# Altium PCB PCB1.PcbDoc
Units mm, origin at the board's own origin, x right, y up, seen from the top; angles counter-clockwise.
Board outline 70 x 52 mm, 2 copper layers (Top Layer, Bottom Layer), stack 1.581 mm thick; 33 components, 46 nets, 205 pads, 143 vias.
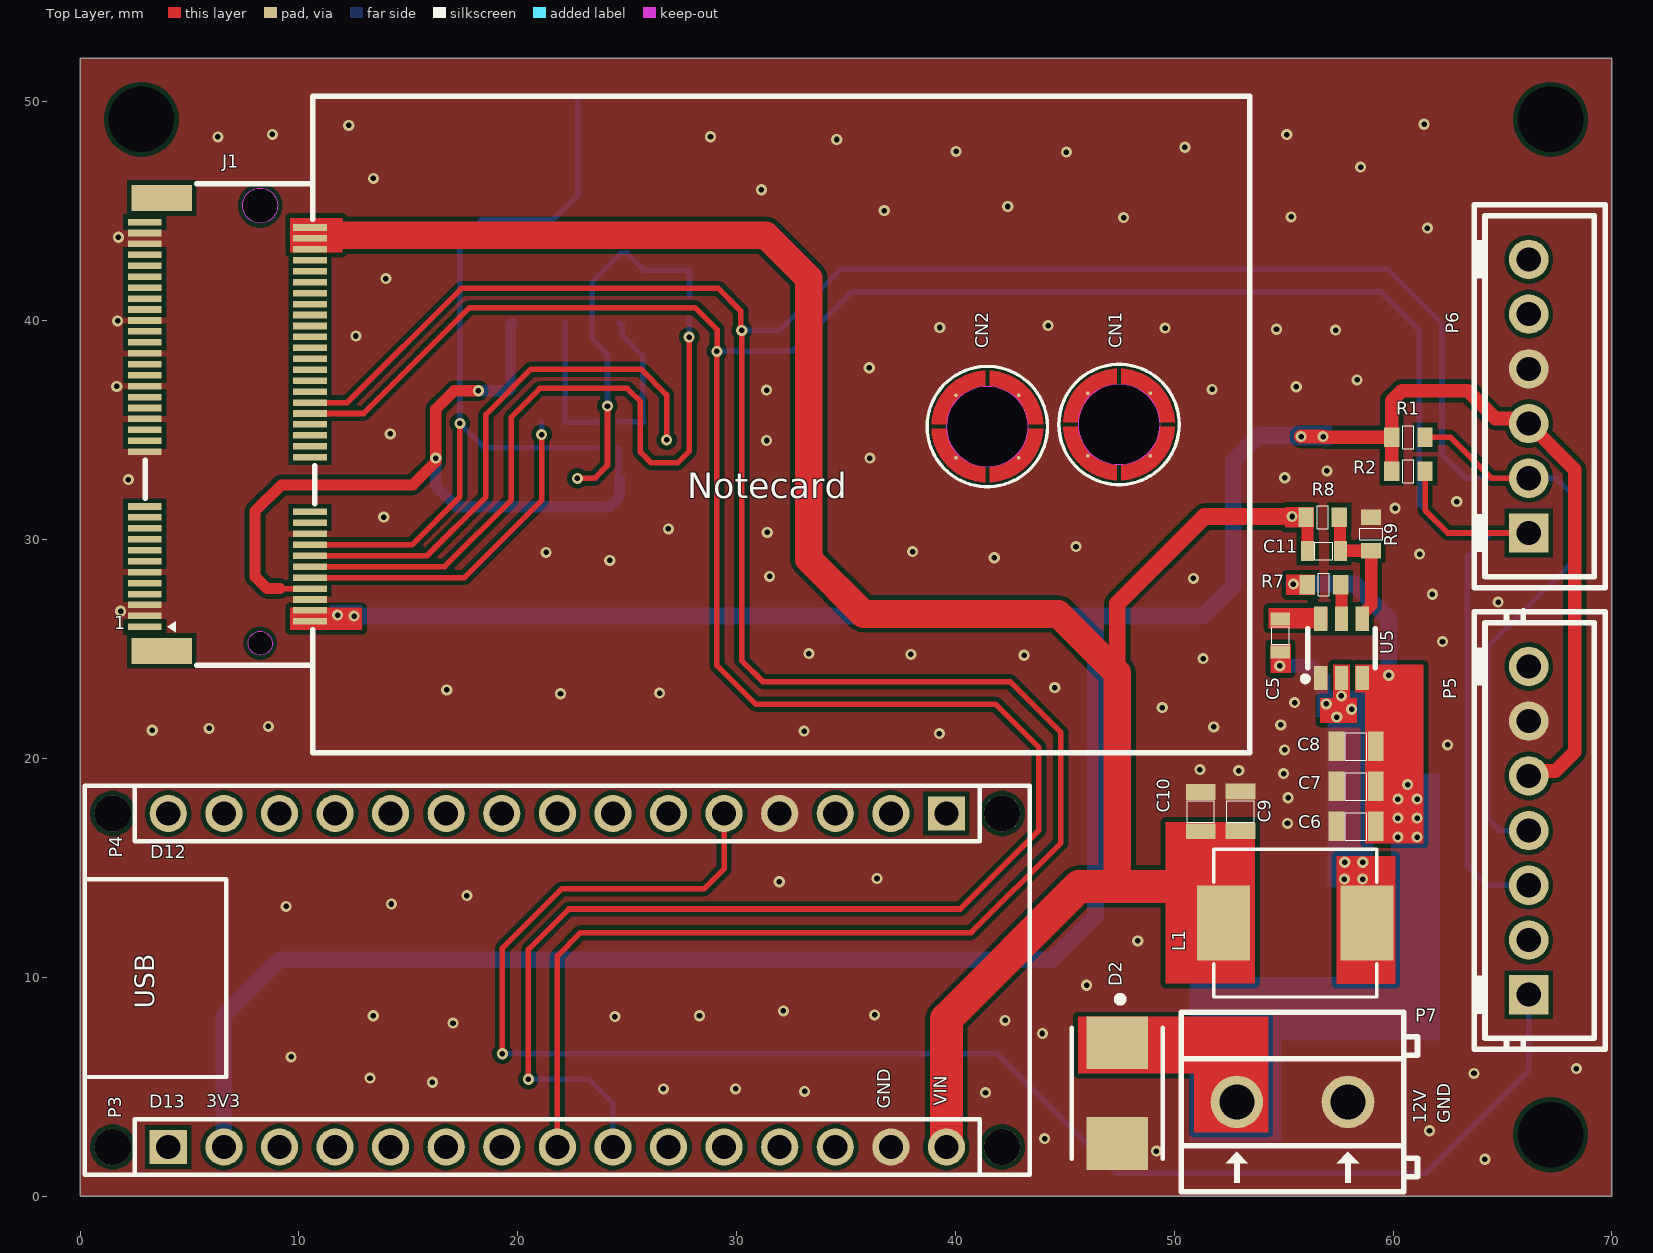
[diagram p0: Top Layer view]
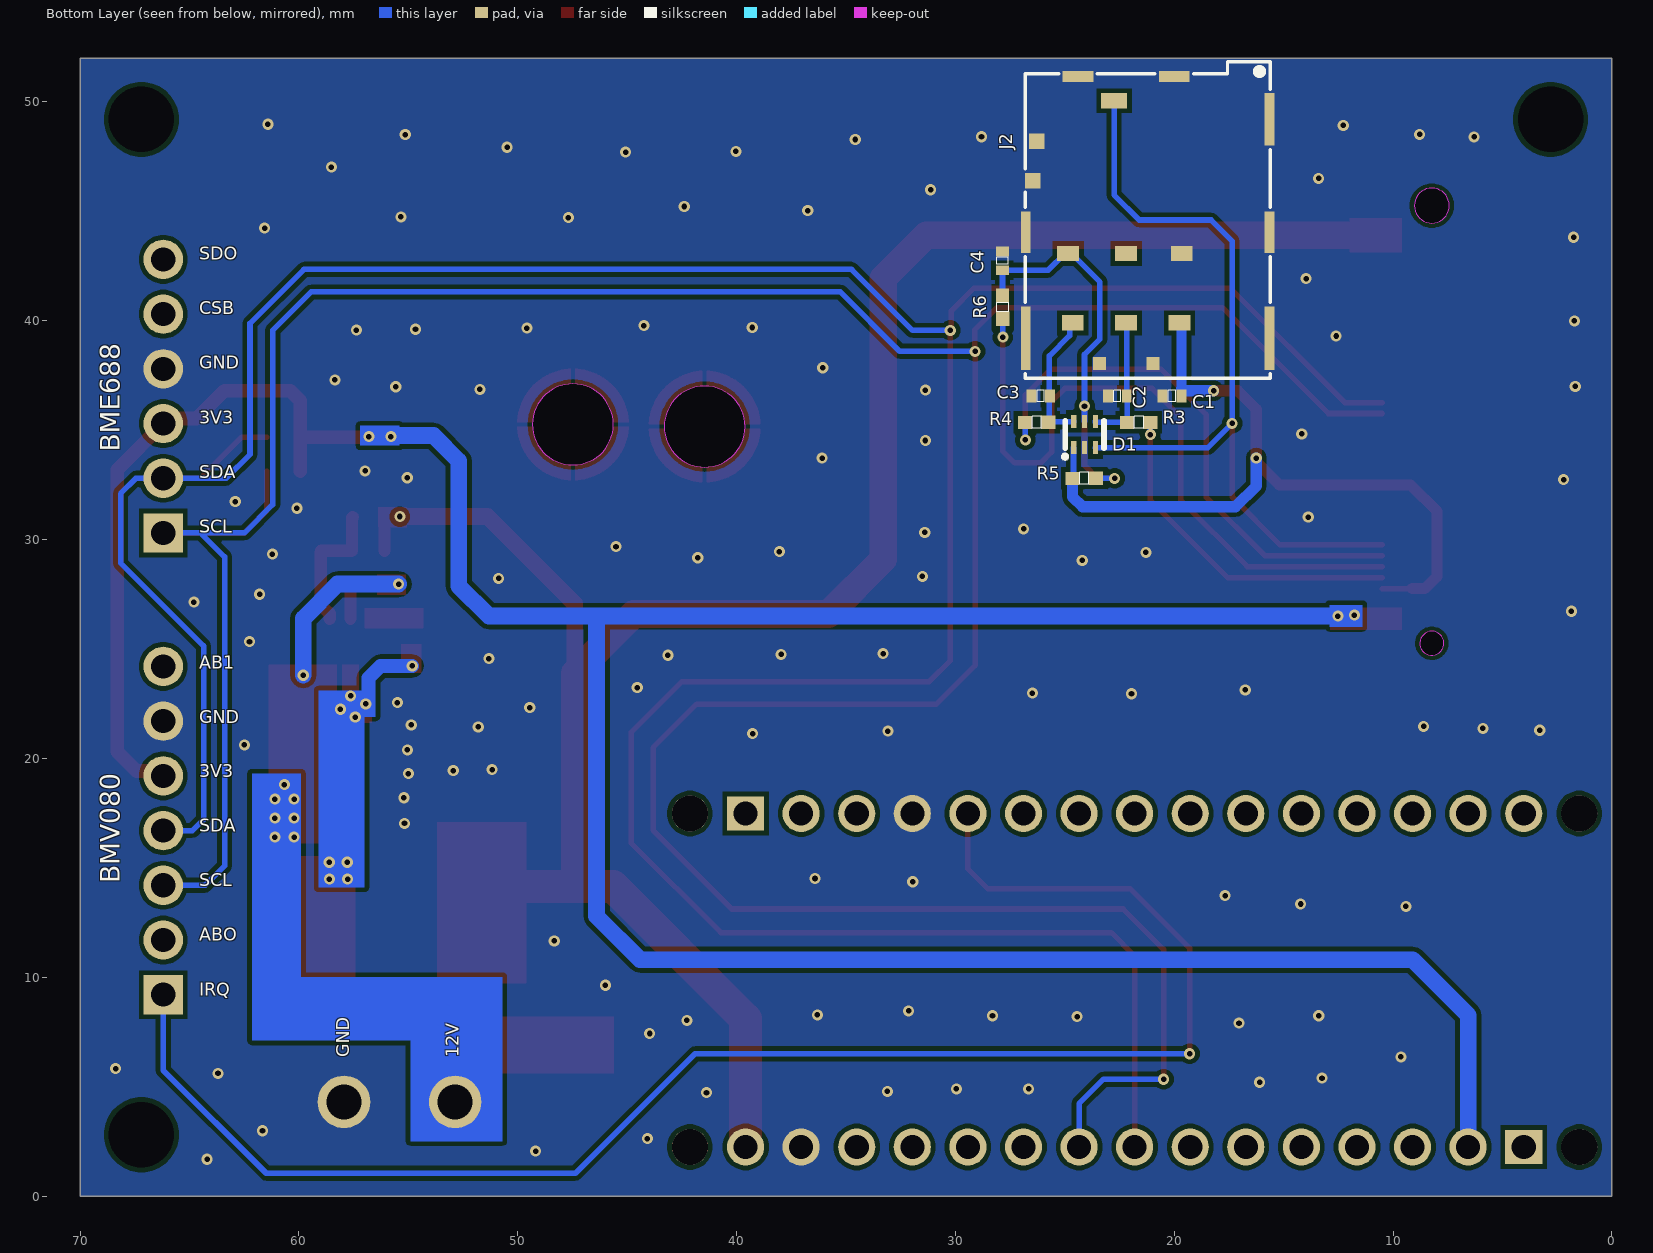
[diagram p1: Bottom Layer view, seen from below]

## Layer stack, top to bottom
Top Solder: solder mask 0.0102, Solder Resist, Dk 3.5
Top Layer: signal copper 0.0356
Dielectric 1: dielectric 1.51, FR-4, Dk 4.8
Bottom Layer: signal copper 0.0356
Bottom Solder: solder mask 0.0102, Solder Resist, Dk 3.5

## Board outline
0,0 0,52 70,52 70,0

## Design rules (kind name [scope] priority, off if disabled: settings)
Clearance [All] p1: gap=0.203 ignorepadtopadclearanceinfootprint=TRUE except(0: Arc-Hole Track-Hole SMDPad-Hole THPad-Hole Via-Hole Fill-Hole Poly-Hole Region-Hole Text-Hole)
HoleSize [All] p1: absolutevalues=TRUE maxlimit=12.7 minlimit=0.025 maxpercent=80.000 minpercent=20.000
MinimumSolderMaskSliver [All] p1: minsoldermaskwidth=0.102
PolygonConnect [All] p1: connectstyle=Direct reliefconductorwidth=0.254 reliefentries=4 polygonreliefangle="90 Angle" airgapwidth=0.254
RoutingVias [All] p1: holewidth=0.254 width=0.508 viastyle="Through Hole" minholewidth=0.254 minwidth=0.508 maxholewidth=0.711 maxwidth=1.27
SilkToSilkClearance [All] p1: silktosilkclearance=0.203
SilkToSolderMaskClearance [IsPad] p1: minsilkscreentomaskgap=0.102 clearancetoexposedcopper=TRUE
SolderMaskExpansion [All] p1: expansion=0.102 istentingtop=FALSE
UnRoutedNet [All] p1: checkbadconnections=TRUE
Width [All] p1: maxlimit=2.54 minlimit=0.203 preferedwidth=0.254
25 further rules are at their usual default settings.

## Components (designator, comment, footprint, x,y, rotation, side; value= is the part's Value field where it differs from the comment)
C1 "100nF" "Ceramic capacitor (0402)" 20.1,36.557 r0 bottom
C2 "33pF" "Ceramic capacitor (0402)" 22.6,36.557 r0 bottom
C3 "33pF" "Ceramic capacitor (0402)" 26.1,36.557 r0 bottom
C4 "33pF" "Ceramic capacitor (0402)" 27.851,42.734 r90 bottom
C5 "0.1uF" "Ceramic capacitor (0603)" 54.85,25.61 r90 top value=100nF
C6 "10uF" "Ceramic capacitor (0805)" 58.31,16.89 r180 top
C7 "10uF" "Ceramic capacitor (0805)" 58.31,18.72 r180 top
C8 "0.1uF" "Ceramic capacitor (0805)" 58.31,20.55 r180 top value=100nF
C9 "22uF" "Ceramic capacitor (0805)" 53.027,17.58 r90 top
C10 "22uF" "Ceramic capacitor (0805)" 51.22,17.57 r90 top
C11 "DNP" "Ceramic capacitor (0603)" 56.84,29.476 r180 top
CN1 "9774025151R" SMD-1_BD5.1-D3.5 47.479,35.258 r0 top
CN2 "9774025151R" SMD-1_BD5.1-D3.5 41.459,35.163 r0 top
D1 "PESD5V0L5UV,115" SOT-666-6_L1.6-W1.2-P0.50-LS1.6-TL 24.1,34.8 r90 bottom
D2 "SS54(SMB)" FP_SS54(SMB) 47.4,4.7 r270 top
J1 "MDT420E01001" CONN-SMD_67P-P0.50_TE_2199119-6 6.73,35.26 r90 top
J2 "SF72S006VBDR2500" NANO-SIM-SMD_SMN-315-ARP7 21.215,44.599 r180 bottom locked
L1 "3.3uF" IND-SMD_L7.3-W6.6 55.53,12.47 r0 top
P3 "KH-2.54FH-1X15P-H8.5" HDR-TH_15P-P2.54-V-F 21.81,2.24 r0 top locked
P4 "KH-2.54FH-1X15P-H8.5" HDR-TH_15P-P2.54-V-F 21.81,17.48 r180 top locked
P5 "B7B-XH-A(LF)(SN)" CONN-TH_7P-P2.50_B7B-XH-A-LF-SN 66.2,16.699 r90 top
P6 "B6B-XH-A(LF)(SN)" CONN-TH_6P-P2.50_B6B-XH-A-LF-SN 66.2,36.55 r90 top
P7 "KF127-5.08-2P" CONN-TH_P5.08_KF127-5.08-2P 55.4,4.3 r0 top
R1 "10K" "Resistor  (0603)" 60.7,34.7 r180 top
R2 "10K" "Resistor  (0603)" 60.7,33.151 r180 top
R3 "22R" "Resistor  (0402)" 21.6,35.355 r0 bottom
R4 "22R" "Resistor  (0402)" 26.3,35.355 r180 bottom
R5 "10K" "Resistor  (0402)" 24.1,32.8 r0 bottom
R6 "22R" "Resistor  (0402)" 27.839,40.6 r90 bottom
R7 "10K" "Resistor  (0603)" 56.84,27.912 r0 top
R8 "54.9K" "Resistor  (0603)" 56.78,31.05 r180 top
R9 "10K" "Resistor  (0603)" 58.97,30.25 r270 top
U5 "TPS563201DDCR" SOT-23-6_L2.9-W1.6-P0.95-LS2.8-BR 57.644,25.03 r270 top

## Footprints (in the part's own frame and the unit in brackets; to place one, negate y for a bottom-side part, rotate by r counter-clockwise, add the part's x,y. Pads: shape width x height; smd on the part's side, far side on the other; paste and mask are expansions set on the pad)
"Ceramic capacitor (0402)" [mm]
  rect 0.45x0.6 smd: 1(-0.43,0) 2(0.43,0)
  silkscreen extent -0.16,-0.26 0.17,0.26, body extent -0.5,-0.25 0.5,0.25, height 0.56
"Ceramic capacitor (0603)" [mm]
  rect 0.6x0.9 smd: 1(-0.75,0) 2(0.75,0)
  silkscreen extent -0.4,-0.4 0.41,0.4, body extent -0.8,-0.4 0.8,0.4, height 0.8
"Ceramic capacitor (0805)" [mm]
  rect 0.725x1.35 smd: 1(-0.9,0) 2(0.9,0)
  silkscreen extent -0.49,-0.62 0.49,0.63, body extent -1,-0.62 1,0.63, height 0.85
CONN-SMD_67P-P0.50_TE_2199119-6 [mil]
  rect 11.8x61 smd paste+0 mask+2: 1(-364.2,148.7) 2(-354.4,-148.6) 3(-344.5,148.7) 4(-334.7,-148.6) 5(-324.8,148.7) 6(-315,-148.6) 7(-305.2,148.7) 8(-295.3,-148.6) 9(-285.5,148.7) 10(-275.6,-148.6) 11(-265.8,148.7) 12(-255.9,-148.6) 13(-246.1,148.7) 14(-236.3,-148.6) 15(-226.4,148.7) 16(-216.6,-148.6) 17(-206.7,148.7) 18(-196.9,-148.6) 19(-187,148.7) 20(-177.2,-148.6) 21(-167.4,148.7) 22(-157.5,-148.6) 23(-147.7,148.7) 32(-59.1,-148.6) 33(-49.3,148.7) 34(-39.4,-148.6) 35(-29.6,148.7) 36(-19.7,-148.6) 37(-9.9,148.7) 38(0,-148.6) 39(9.8,148.7) 40(19.6,-148.6) 41(29.5,148.7) 42(39.3,-148.6) 43(49.2,148.7) 44(59,-148.6) 45(68.9,148.7) 46(78.7,-148.6) 47(88.5,148.7) 48(98.4,-148.6) 49(108.2,148.7) 50(118.1,-148.6) 51(127.9,148.7) 52(137.8,-148.6) 53(147.6,148.7) 54(157.4,-148.6) 55(167.3,148.7) 56(177.1,-148.6) 57(187,148.7) 58(196.8,-148.6) 59(206.7,148.7) 60(216.5,-148.6) 61(226.3,148.7) 62(236.2,-148.6) 63(246,148.7) 64(255.9,-148.6) 65(265.7,148.7) 66(275.6,-148.6) 67(285.4,148.7) 68(295.2,-148.6) 69(305.1,148.7) 70(314.9,-148.6) 71(324.8,148.7) 72(334.6,-148.6) 73(344.4,148.7) 74(354.3,-148.6) 75(364.1,148.7)
  rect 47.2x108.3 smd paste+0 mask+2: 76(-407.5,118.1) 77(407.4,118.1)
  round 19.68 hole 43.31: ""(-393.7,-59.06)
  round 39.37 hole 62.99: ""(393.7,-59.06)
  Keep-Out Layer board cut-out: 425.2,-59 424.8,-64 423.6,-68.8 421.7,-73.3 419.1,-77.5 415.9,-81.3 412.2,-84.5 408,-87.1 403.4,-89 398.6,-90.1 393.7,-90.5 388.7,-90.1 383.9,-89 379.4,-87.1 375.1,-84.5 371.4,-81.3 368.2,-77.5 365.6,-73.3 363.7,-68.8 362.6,-64 362.2,-59 362.6,-54.1 363.7,-49.3 365.6,-44.7 368.2,-40.5 371.4,-36.8 375.1,-33.5 379.4,-31 383.9,-29.1 388.7,-27.9 393.7,-27.5 398.6,-27.9 403.4,-29.1 408,-31 412.2,-33.5 415.9,-36.8 419.1,-40.5 421.7,-44.7 423.6,-49.3 424.8,-54.1 425.2,-59
  Keep-Out Layer board cut-out: -372.1,-59 -372.5,-63.1 -373.6,-67.1 -375.5,-70.7 -378.1,-74 -381.2,-76.7 -384.7,-78.7 -388.6,-80.1 -392.7,-80.7 -396.8,-80.5 -400.8,-79.5 -404.6,-77.8 -407.9,-75.4 -410.8,-72.4 -413,-69 -414.5,-65.1 -415.3,-61.1 -415.3,-57 -414.5,-52.9 -413,-49.1 -410.8,-45.6 -407.9,-42.7 -404.6,-40.3 -400.8,-38.6 -396.8,-37.6 -392.7,-37.4 -388.6,-38 -384.7,-39.3 -381.2,-41.4 -378.1,-44.1 -375.5,-47.3 -373.6,-51 -372.5,-54.9 -372.1,-59
  silkscreen extent -433,-157 433,148, body extent -431,-171 431,172, height 121
CONN-TH_6P-P2.50_B6B-XH-A-LF-SN [mm]
  rect 1.801x1.801 hole 1.1: 1(-6.251,0)
  round 1.801 hole 1.1: 2(-3.749,0) 3(-1.25,0) 4(1.252,0) 5(3.752,0) 6(6.251,0)
  silkscreen extent -8.75,-3.5 8.75,2.5, body extent -8.75,-3.35 8.75,2.35, height 7.02
CONN-TH_7P-P2.50_B7B-XH-A-LF-SN [mm]
  rect 1.801x1.801 hole 1.1: 1(-7.501,0)
  round 1.801 hole 1.1: 2(-5.001,0) 3(-2.499,0) 4(0,0) 5(2.499,0) 6(4.999,0) 7(7.501,0)
  silkscreen extent -10,-3.5 10.03,2.5, body extent -9.98,-3.33 10.02,2.37, height 7.02
CONN-TH_P5.08_KF127-5.08-2P [mil]
  round 94.5 hole 63: 1(-100,0) 2(100,0)
  silkscreen extent -200,-161 225,161, body extent -200,-161 222,161, height 398
FP_SS54(SMB) [mm]
  rect 2.4x2.8 smd: 1(-2.3,0) 2(2.3,0)
  silkscreen extent -4.43,-2.08 2.99,2.08
HDR-TH_15P-P2.54-V-F [mil]
  rect 66.9x62 hole 43.3: 1(-700,0)
  round 66.9 hole 43.3: 2(-600,0) 3(-500,0) 4(-400,0) 5(-300,0) 6(-200,0) 7(-100,0) 8(0,0) 9(100,0) 10(200,0) 11(300,0) 12(400,0) 13(500,0) 14(600,0) 15(700,0)
  silkscreen extent -760,-50 760,50, body extent -758,-49 757,50, height 335
IND-SMD_L7.3-W6.6 [mil]
  rect 95.4x134.6 smd: 1(129,0) 2(-129.1,0)
  silkscreen extent -147,-133 147,133, body extent -140,-130 140,130, height 114
NANO-SIM-SMD_SMN-315-ARP7 [mil]
  rect 39.4x27.6 smd: 1(57.3,-185) 2(-38.7,-185) 3(-134.8,-185) 5(61.3,-60.2) 6(-38.7,-60.2) 7(-143.1,-60.2)
  rect 23.6x23.6 smd: 4(9.3,-257.9) 8(-86.8,-257.9)
  rect 27.6x27.6 smd: 9(-206.8,70.9) 13(-199.8,141.7)
  rect 47.2x27.6 smd: 10(-60.4,214.6)
  rect 17.7x114.2 smd: 11(-219.4,-212.6) 18(219.5,-212.6)
  rect 17.7x74.8 smd: 12(-219.4,-21.6) 17(219.5,-21.6)
  rect 55.1x19.7 smd: 14(-125.4,257.9) 15(47.9,257.9)
  rect 17.7x94.5 smd: 16(219.5,181.1)
  silkscreen extent -220,-285 221,285, body extent -220,-285 221,285, height 51
"Resistor  (0402)" [mm]
  rect 0.65x0.6 smd: 1(-0.508,0) 2(0.544,0.006)
  silkscreen extent -0.2,-0.28 0.23,0.28, body extent -0.73,-0.25 0.76,0.25, height 0.36
"Resistor  (0603)" [mm]
  rect 0.7x0.9 smd: 1(-0.762,0.025) 2(0.762,0.025)
  silkscreen extent -0.25,-0.49 0.25,0.55, body extent -1.05,-0.38 1.05,0.42, height 0.5
SMD-1_BD5.1-D3.5 [mm]
  round 0.17 smd: 1(-1.433,-1.433) 1(-1.433,1.43) 1(1.43,-1.433) 1(1.43,1.43)
  Top Layer region: 2.55,0.099 1.849,0.099 1.844,0.16 1.839,0.221 1.831,0.282 1.819,0.343 1.808,0.404 1.793,0.465 1.775,0.523 1.758,0.582 1.737,0.64 1.717,0.699 1.692,0.754 1.666,0.81 1.638,0.866 1.608,0.919 1.577,0.973 1.544,1.024 1.509,1.074 1.473,1.125 1.435,1.173 1.394,1.219 1.354,1.265 1.311,1.311 1.265,1.354 1.219,1.394 1.173,1.435 1.125,1.473 1.074,1.509 1.024,1.544 0.973,1.577 0.919,1.608 0.866,1.638 0.81,1.666 0.754,1.692 0.699,1.717 0.64,1.737 0.582,1.758 0.523,1.775 0.465,1.793 0.404,1.808 0.343,1.819 0.282,1.831 0.221,1.839 0.16,1.844 0.099,1.849 0.099,2.55 0.173,2.545 0.246,2.54 0.318,2.532 0.391,2.522 0.462,2.51 0.536,2.494 0.607,2.479 0.678,2.459 0.747,2.438 0.818,2.418 0.886,2.393 0.955,2.367 1.021,2.337 1.09,2.306 1.156,2.276 1.219,2.24 1.283,2.205 1.346,2.167 1.407,2.129 1.468,2.088 1.527,2.045 1.585,1.999 1.643,1.953 1.697,1.905 1.753,1.854 1.803,1.803 1.854,1.753 1.905,1.697 1.953,1.643 1.999,1.585 2.045,1.527 2.088,1.468 2.129,1.407 2.167,1.346 2.205,1.283 2.24,1.219 2.276,1.156 2.306,1.09 2.337,1.021 2.367,0.955 2.393,0.886 2.418,0.818 2.438,0.747 2.459,0.678 2.479,0.607 2.494,0.536 2.51,0.462 2.522,0.391 2.532,0.318 2.54,0.246 2.545,0.173 2.55,0.099
  Top Layer region: -0.102,2.55 -0.102,1.849 -0.163,1.844 -0.224,1.839 -0.284,1.831 -0.345,1.821 -0.406,1.808 -0.465,1.793 -0.526,1.778 -0.584,1.758 -0.643,1.737 -0.699,1.717 -0.757,1.692 -0.813,1.666 -0.866,1.638 -0.922,1.608 -0.973,1.577 -1.026,1.544 -1.077,1.509 -1.125,1.473 -1.173,1.435 -1.222,1.394 -1.267,1.354 -1.311,1.311 -1.354,1.265 -1.394,1.219 -1.435,1.173 -1.473,1.125 -1.511,1.074 -1.544,1.024 -1.577,0.973 -1.61,0.919 -1.638,0.866 -1.666,0.81 -1.694,0.754 -1.717,0.699 -1.74,0.64 -1.76,0.582 -1.778,0.523 -1.796,0.465 -1.808,0.404 -1.821,0.343 -1.831,0.282 -1.839,0.221 -1.847,0.16 -1.852,0.099 -2.55,0.099 -2.548,0.173 -2.54,0.246 -2.532,0.318 -2.522,0.391 -2.51,0.462 -2.497,0.536 -2.479,0.607 -2.461,0.678 -2.441,0.747 -2.418,0.818 -2.395,0.886 -2.367,0.955 -2.339,1.021 -2.309,1.09 -2.276,1.156 -2.243,1.219 -2.207,1.283 -2.169,1.346 -2.129,1.407 -2.088,1.468 -2.045,1.527 -2.002,1.585 -1.953,1.643 -1.908,1.697 -1.857,1.753 -1.806,1.803 -1.753,1.854 -1.699,1.905 -1.643,1.953 -1.587,1.999 -1.529,2.045 -1.471,2.088 -1.41,2.129 -1.349,2.167 -1.285,2.205 -1.222,2.24 -1.156,2.276 -1.09,2.306 -1.024,2.337 -0.955,2.367 -0.889,2.393 -0.818,2.418 -0.749,2.438 -0.678,2.459 -0.607,2.479 -0.536,2.494 -0.465,2.51 -0.391,2.522 -0.32,2.532 -0.246,2.54 -0.173,2.545 -0.102,2.55
  Top Layer region: -2.55,-0.102 -1.852,-0.102 -1.847,-0.163 -1.841,-0.224 -1.831,-0.284 -1.821,-0.345 -1.808,-0.406 -1.796,-0.465 -1.778,-0.526 -1.76,-0.584 -1.74,-0.643 -1.717,-0.699 -1.694,-0.757 -1.666,-0.813 -1.638,-0.866 -1.61,-0.922 -1.577,-0.973 -1.544,-1.026 -1.511,-1.077 -1.473,-1.125 -1.435,-1.173 -1.397,-1.222 -1.354,-1.267 -1.311,-1.311 -1.267,-1.354 -1.222,-1.394 -1.173,-1.435 -1.125,-1.473 -1.077,-1.511 -1.026,-1.544 -0.973,-1.577 -0.922,-1.61 -0.866,-1.638 -0.813,-1.666 -0.757,-1.694 -0.699,-1.717 -0.643,-1.74 -0.584,-1.76 -0.526,-1.778 -0.465,-1.796 -0.406,-1.808 -0.345,-1.821 -0.284,-1.831 -0.224,-1.839 -0.163,-1.847 -0.102,-1.852 -0.102,-2.55 -0.175,-2.548 -0.246,-2.54 -0.32,-2.532 -0.391,-2.522 -0.465,-2.51 -0.536,-2.497 -0.607,-2.479 -0.678,-2.461 -0.749,-2.441 -0.818,-2.418 -0.889,-2.395 -0.955,-2.367 -1.024,-2.339 -1.09,-2.309 -1.156,-2.276 -1.222,-2.243 -1.285,-2.207 -1.349,-2.169 -1.41,-2.129 -1.471,-2.088 -1.529,-2.045 -1.587,-2.002 -1.643,-1.953 -1.699,-1.908 -1.753,-1.857 -1.806,-1.806 -1.857,-1.753 -1.908,-1.699 -1.953,-1.643 -2.002,-1.587 -2.045,-1.529 -2.088,-1.471 -2.129,-1.41 -2.169,-1.349 -2.207,-1.285 -2.243,-1.222 -2.276,-1.156 -2.309,-1.09 -2.339,-1.024 -2.367,-0.955 -2.395,-0.889 -2.418,-0.818 -2.441,-0.749 -2.461,-0.678 -2.479,-0.607 -2.497,-0.536 -2.51,-0.465 -2.522,-0.391 -2.532,-0.32 -2.54,-0.246 -2.548,-0.173 -2.55,-0.102
  Top Layer region: 0.099,-2.55 0.099,-1.852 0.16,-1.847 0.221,-1.841 0.282,-1.831 0.343,-1.821 0.404,-1.808 0.465,-1.796 0.523,-1.778 0.582,-1.76 0.64,-1.74 0.699,-1.717 0.754,-1.694 0.81,-1.666 0.866,-1.638 0.919,-1.61 0.973,-1.577 1.024,-1.544 1.074,-1.511 1.125,-1.473 1.173,-1.435 1.219,-1.397 1.265,-1.354 1.311,-1.311 1.354,-1.267 1.394,-1.222 1.433,-1.173 1.473,-1.125 1.509,-1.077 1.544,-1.026 1.577,-0.973 1.608,-0.922 1.638,-0.866 1.666,-0.813 1.692,-0.757 1.714,-0.699 1.737,-0.643 1.758,-0.584 1.775,-0.526 1.793,-0.465 1.808,-0.406 1.819,-0.345 1.831,-0.284 1.839,-0.224 1.844,-0.163 1.849,-0.102 2.55,-0.102 2.545,-0.175 2.54,-0.246 2.532,-0.32 2.522,-0.391 2.51,-0.465 2.494,-0.536 2.479,-0.607 2.459,-0.678 2.438,-0.749 2.418,-0.818 2.393,-0.889 2.365,-0.955 2.337,-1.024 2.306,-1.09 2.276,-1.156 2.24,-1.222 2.205,-1.285 2.167,-1.349 2.129,-1.41 2.088,-1.471 2.045,-1.529 1.999,-1.587 1.953,-1.643 1.905,-1.699 1.854,-1.753 1.803,-1.806 1.753,-1.857 1.697,-1.908 1.643,-1.953 1.585,-2.002 1.527,-2.045 1.468,-2.088 1.407,-2.129 1.346,-2.169 1.283,-2.207 1.219,-2.243 1.156,-2.276 1.09,-2.309 1.021,-2.339 0.955,-2.367 0.886,-2.395 0.818,-2.418 0.747,-2.441 0.678,-2.461 0.607,-2.479 0.533,-2.497 0.462,-2.51 0.391,-2.522 0.318,-2.532 0.246,-2.54 0.173,-2.548 0.099,-2.55
  Keep-Out Layer board cut-out: 1.849,0 1.839,-0.193 1.808,-0.386 1.758,-0.572 1.689,-0.754 1.6,-0.925 1.496,-1.087 1.374,-1.24 1.237,-1.377 1.087,-1.499 0.925,-1.603 0.752,-1.692 0.572,-1.76 0.384,-1.811 0.193,-1.841 0,-1.852 -0.193,-1.841 -0.386,-1.811 -0.572,-1.76 -0.754,-1.692 -0.925,-1.603 -1.087,-1.499 -1.24,-1.377 -1.377,-1.24 -1.499,-1.087 -1.603,-0.925 -1.692,-0.754 -1.76,-0.572 -1.811,-0.386 -1.841,-0.193 -1.852,0 -1.841,0.193 -1.811,0.384 -1.76,0.572 -1.692,0.752 -1.603,0.925 -1.499,1.087 -1.377,1.237 -1.24,1.374 -1.087,1.496 -0.925,1.6 -0.754,1.689 -0.572,1.758 -0.386,1.808 -0.193,1.839 0,1.849 0.193,1.839 0.384,1.808 0.572,1.758 0.752,1.689 0.925,1.6 1.087,1.496 1.237,1.374 1.374,1.237 1.496,1.087 1.6,0.925 1.689,0.752 1.758,0.572 1.808,0.384 1.839,0.193 1.849,0
  silkscreen extent -2.75,-2.75 2.75,2.75, body extent -2.55,-2.55 2.55,2.55, height 2.5
SOT-23-6_L2.9-W1.6-P0.95-LS2.8-BR [mm]
  rect 1.1x0.599 smd paste+0 mask+0.051: 1(1.351,-0.95) 2(1.351,0) 3(1.351,0.95) 4(-1.349,0.95) 5(-1.349,0) 6(-1.349,-0.95)
  silkscreen extent -0.9,-1.78 1.52,1.55, body extent -1.44,-1.45 1.37,1.45, height 1.65
SOT-666-6_L1.6-W1.2-P0.50-LS1.6-TL [mm]
  rect 0.599x0.249 smd: 1(-0.599,0.5) 2(-0.599,0) 3(-0.599,-0.5) 4(0.599,-0.5) 5(0.599,0) 6(0.599,0.5)
  silkscreen extent -1.1,-0.89 0.64,0.98, body extent -0.81,-0.77 0.79,0.83, height 0.61

## Part data
C1: library part Cap, "Capacitor", Package=0402, Part Number=C1525
C2 C3 C4: library part Cap, "Capacitor", Package=0402, Part Number=C107005
C5: library part Cap, "Capacitor", Package=0603, Part Number=C14663
C6 C7: library part Cap, "Capacitor", Package=0805, Part Number=C15850
C8: library part Cap, "Capacitor", Package=0805, Part Number=C519981
C9 C10: library part Cap, "Capacitor", Package=0805, Part Number=C296720
C11: library part Cap, "Capacitor", Part Number=DNP
CN1 CN2: library part 9774025151R_C7496631, JLCPCB Part Class="Extended Part", LCSC Part Name=SMT钢质间隔柱，带内螺纹, Manufacturer=Wurth(伍尔特), Part Number=C7496631, AddInBom=yes, ConvertToPcb=yes, Datasheet=https://www.we-online.com/components/products/datasheet/9774025151R.pdf, Device=9774025151R_C7496631, FootprintName=SMD-1_BD5.1-D3.5, ManufacturerPart=9774025151R, Supplier=LCSC, Supplier Footprint=SMD, Symbol=9774025151R_C7496631
D1: "Polarity:Unidirectional Reverse Stand-Off Voltage (Vrwm):5V Clamping Voltage:12V Peak Pulse Current (Ipp):2.5A Peak Pulse Power Dissipation (Ppp):25W Voltage - Breakdown:6.4V Reverse Leakage Current (Ir):5nA Number of Channels:5 Operating Temperature:-65℃", Clamping Voltage=12V, JLCPCB Part Class="Extended Part", Junction Capacitance=16pF, LCSC Part Name="单向ESD 5V截止 峰值脉冲电流：2.5A", Manufacturer=Nexperia(安世), Operating Temperature=-65℃~+150℃@(Ta), Part Number=C84255, Peak Pulse Current (Ipp)=2.5A, Peak Pulse Power Dissipation (Ppp)=25W, Reverse Leakage Current (Ir)=5nA, Reverse Stand-Off Voltage (Vrwm)=5V, Voltage - Breakdown=6.4V, AddInBom=yes, ConvertToPcb=yes, Datasheet=https://item.szlcsc.com/datasheet/PESD5V0L5UV%252C115/85424.html, Device=PESD5V0L5UV,115, FootprintName=SOT-666-6_L1.6-W1.2-P0.50-LS1.6-TL, level of protection="IEC 61000-4-5；IEC 61000-4-2", ManufacturerPart=PESD5V0L5UV,115, ModelId=d819e0c908004c6d9ba8e512fd29870dÂŽ0819f05c4eef4c71ace90d822a990e87, ModelName=SOT-666-6P_L1.6-W1.2-H0.6-LS1.6-P0.50, ModelTransform=62.992,62.992,0,0,0,0,0,-0.787,0, Number of Channels=5, Polarity=Unidirectional, Supplier=LCSC, Supplier Footprint=SOT-666-6, Symbol=PESD5V0L5UV,115, Type=ESD
D2: library part "D Schottky", "Schottky Diode", Part Number=C4154972, Code_JEDEC=DO-214-AA, LatestRevisionDate=17-Jul-2002, LatestRevisionNote="Re-released for DXP Platform.", PackageDescription="DO-214-AA/SMB; 2 C-Bend Leads; Body 5.3 x 3.6 mm, inc. leads (LxW)", PackageReference=SMB, Published=8-Jun-2000, Publisher="Altium Limited"
J1: "Pitch:0.5mm Number of Pins:67P Mounting Type:Surface Mount, Right Angle Contact Material:Copper Alloy Contact Plating:Gold Operating Temperature:-40℃~+80℃ Operating Temperature:-40℃~+80℃", JLCPCB Part Class="Extended Part", LCSC Part Name="0.5mm P数:67P", Manufacturer=Amphenol, Operating Temperature=-40℃~+80℃, Part Number=C4529147, AddInBom=yes, Contact Material="Copper Alloy", Contact Plating=Gold, ConvertToPcb=yes, Datasheet=https://item.szlcsc.com/datasheet/MDT420E01001/5100227.html, Device=MDT420E01001, FootprintName=CONN-SMD_67P-P0.50_TE_2199119-6, ManufacturerPart=MDT420E01001, ModelId=e7e3dc45d4774ef5a0346ca1df8579fbÂŽ0819f05c4eef4c71ace90d822a990e87, ModelName=CONN-SMD_67P-P0.50_TE_2199119-6, ModelTransform=862.203,342.51896,0,0,0,0,0,0,-21.6535, Mounting Type="Surface Mount, Right Angle", Number of Pins=67P, Pitch=0.5mm, Supplier=LCSC, Supplier Footprint=SMD,P=0.5mm,卧贴, Symbol=MDT420E01001
J2: "Card Connection Mode:Push-Push Card Type:Nano-SIM Card Connector Type:Connector and Ejector Height Above Board:1.25mm Rated Voltage (Max):10V Operating Temperature:-25℃~+85℃ Operating Temperature:-25℃~+85℃", JLCPCB Part Class="Extended Part", LCSC Part Name="自弹式 NanoSIM卡 卡座", Manufacturer=JAE(日本航空电子), Operating Temperature=-25℃~+85℃, Part Number=C2977286, Rated Voltage (Max)=10V, AddInBom=yes, Card Connection Mode=Push-Push, Card Type="Nano-SIM Card", Connector Type="Connector and Ejector", ConvertToPcb=yes, Datasheet=https://item.szlcsc.com/datasheet/SF72S006VBDR2500/3386692.html, Device=SF72S006VBDR2500, FootprintName=NANO-SIM-SMD_SMN-315-ARP7, Height Above Board=1.25mm, ManufacturerPart=SF72S006VBDR2500, ModelId=655216ee1d564b619435ec7217f45a29ÂŽ0819f05c4eef4c71ace90d822a990e87, ModelName=NANO-SIM-SMD_SMN-315-ARP7, ModelTransform=440.944,569.036,0,0,0,0,-0.003,0.004,0, Supplier=LCSC, Supplier Footprint=SMD, Symbol=SF72S006VBDR2500
L1: library part Inductor, "Inductor", Part Number=C128687, LatestRevisionDate=29-May-2009, LatestRevisionNote="IPC-7351 Footprint Added.", PackageDescription="Chip Inductor", PackageReference=0402-A, Published=8-Jun-2000, Publisher="Altium Limited"
P3 P4: library part "Header 15", "Header, 15-Pin", Part Number=C2932676, LatestRevisionDate=17-Jul-2002, LatestRevisionNote="Re-released for DXP Platform.", Publisher="Altium Limited"
P5: library part "Header 7", Part Number=C144398, LatestRevisionDate=17-Jul-2002, LatestRevisionNote="Re-released for DXP Platform.", Publisher="Altium Limited"
P6: library part "Header 6", Part Number=C144397, LatestRevisionDate=17-Jul-2002, LatestRevisionNote="Re-released for DXP Platform.", Publisher="Altium Limited"
P7: library part "Header 2", "Header, 2-Pin", Part Number=C474906, LatestRevisionDate=17-Jul-2002, LatestRevisionNote="Re-released for DXP Platform.", Publisher="Altium Limited"
R1 R2: library part "Res Semi", "Semiconductor Resistor", Package=0603, Part Number=C191124
R3 R4 R6: library part "Res Semi", "Semiconductor Resistor", Package=0402, Part Number=C25092
R5: library part "Res Semi", "Semiconductor Resistor", Package=0402, Part Number=C427247
R7: library part "Res Semi", "Semiconductor Resistor", Package=0603, Part Number=C136139
R8: library part "Res Semi", "Semiconductor Resistor", Package=0603, Part Number=C185321
R9: library part "Res Semi", "Semiconductor Resistor", Package=0603, Part Number=C130232
U5: "Function:Step-down type Voltage - Supply:4.5V~17V Voltage - Supply:4.5V~17V Output Voltage:768mV~7V Output Voltage:768mV~7V Output Current:3A Frequency - Switching:580kHz Frequency - Switching:580kHz Operating Temperature:-40℃~+125℃@(TJ) Operating Tempera", Frequency - Switching=580kHz, JLCPCB Part Class="Extended Part", LCSC Part Name="降压型 3A 4.5V~17V", Manufacturer=TI(德州仪器), Operating Temperature=-40℃~+125℃@(TJ), Output Current=3A, Output Voltage=768mV~7V, Part Number=C116592, Quiescent Current=380uA, Voltage - Supply=4.5V~17V, AddInBom=yes, ConvertToPcb=yes, Datasheet=https://item.szlcsc.com/datasheet/TPS563201DDCR/117846.html, Device=TPS563201DDCR, Features="Light load efficient mode；Cycle-by-cycle current limiting；Overcurrent Protection；Hiccup current limiting", FootprintName=SOT-23-6_L2.9-W1.6-P0.95-LS2.8-BR, Function="Step-down type", ManufacturerPart=TPS563201DDCR, ModelId=1370be37a17e44418ae52e2b4cc1f5e5ÂŽ0819f05c4eef4c71ace90d822a990e87, ModelName=SOT-23-6_L2.9-W1.6-H1.5-LS2.8-P0.95, ModelTransform=110.73671,114.173,0,180,0,0,0.001,-0.003,0, Number of Outputs=1, Output Type=Adjustable, Supplier=LCSC, Supplier Footprint=SOT-23-THIN-6, Switch tube (built-in/external)=Built-in, Symbol=TPS563201DDCR, Synchronous Rectifier=Yes, Topology=Buck

## Free pads (board coordinates)
  round 1.651 hole 1.651 unplated: MH(1.49,2.24) MH(1.49,17.48) MH(42.13,2.24) MH(42.13,17.48)
  round 2.8 hole 3: ""(2.8,49.2) ""(67.2,2.8) ""(67.2,49.2)

## Via types
v1: diameter 0.508, hole 0.254, Top Layer to Bottom Layer, 143 vias

## Nets (pads, with @x,y where several pads share a name; then routed paths per layer and width w, separated by ;. In a path a pad name is that pad's centre, name@x,y a point inside that pad or via, vN(x,y) a via of type N, cw(c..) or ccw(c..) an arc to the next point about the centre after c; other vN are vias at no path point)
3V3: J1.2 J1.4 P3.2 P5.5 P6.3 R1.2 R2.2 | length 144.4
  Top Layer w0.635: v1(55.8,34.7) v1(56.8,34.7) 56.825,34.675 R1.2 ; R2.2 R1.2 ; P5.5 66.423,19.422 67.422,19.422 68.3,20.3 68.3,33.2 P6.3 65.977,35.523 64.677,35.523 63.4,36.8 60.4,36.8 59.938,36.338 R1.2
  Bottom Layer w0.762: P3.2 6.57,8.267 9.103,10.8 44.413,10.8 46.398,12.785 46.398,26.502 ; v1(12.518,26.502) 46.398,26.502 ; v1(55.8,34.7) 55.8,34.731 55.781,34.75 53.85,34.75 52.7,33.6 52.7,27.878 51.324,26.502 46.398,26.502
  other v1: 11.764,26.542
5V: C9.1 C10.1 C11.2 J1.70 J1.72 J1.74 L1.2 P3.15 R8.2 | length 99
  Top Layer w0.559: R8.2 56.018,30.925 56.09,30.852 C11.2
  Top Layer w0.762: 47.4,23.9 47.4,27.075 51.376,31.051 v1(55.383,31.051) ; 50.35,16.3 51.4,16.3
  Top Layer w1.27: J1.72 10.652,43.906 31.331,43.906 33.3,41.937 33.3,29.1 35.8,26.6 44.7,26.6 47.4,23.9 47.4,14.15
  Top Layer w1.5: P3.15 39.59,8.09 45.65,14.15 47.4,14.15 51.55,14.15 51.7,14.3 ; 50.35,15.8 50.35,16.3
12V: C6.1 C7.1 C8.1 D2.1 P7.1 R7.1 U5.3 | length 7.6
  Bottom Layer w0.762: v1(55.443,27.964) 58.236,27.964 59.8,26.4 v1(59.8,23.8)
  other v1: 60.223,16.4 61.1,16.4 60.223,17.268 61.1,17.268 60.223,18.136 61.1,18.136 60.668,18.798
AB1: P5.7
ABO: P5.2
B0: P3.3
B1: P3.13
CSB: P6.5
D3: P4.6
D4: P4.7
D5: P4.8
D6: P4.9
D7: P4.10
D8: P4.11
D9: P4.12
D10: P4.13
D11: P4.14
D12: P4.15
D13: P3.1
D17: P3.4
D18: P3.5
D19: P3.6
D20: P3.7
D23: P3.10
D24: P3.11
GND: C1.2 C2.2 C3.2 C4.2 C6.2 C7.2 C8.2 C9.2 C10.2 D1.2 D2.2 J1.3 J1.5 J1.6 J1.11 J1.18 J1.33 J1.39 J1.45 J1.51 J1.57 J1.71 J1.73 J2.4 J2.5 J2.8 J2.9 J2.11 J2.12 J2.13 J2.14 J2.15 J2.16 J2.17 J2.18 P3.14 P4.4 P5.6 P6.4 P7.2 R9.1 U5.1
  other v1: 64.192,1.682 49.184,2.051 44.075,2.625 61.664,2.983 41.375,4.725 33.112,4.783 26.654,4.896 29.958,4.896 16.102,5.196 13.248,5.384 63.698,5.602 68.375,5.825 9.643,6.36 43.975,7.425 17.041,7.9 42.275,8.025 24.438,8.2 13.398,8.238 28.306,8.238 36.304,8.276 32.136,8.463 45.998,9.629 48.332,11.658 9.418,13.232 14.224,13.345 17.675,13.725 31.948,14.359 36.417,14.509 55.175,17.025 55.2,18.2 55,19.3 52.948,19.441 51.176,19.483 55.04,20.387 62.491,20.612 39.265,21.128 33.088,21.242 3.298,21.282 5.897,21.372 51.804,21.441 8.604,21.463 54.868,21.526 49.454,22.319 55.502,22.55 21.955,22.952 26.48,22.981 16.753,23.128 44.54,23.23 51.322,24.555 43.138,24.711 37.966,24.75 33.307,24.79 62.258,25.335 1.851,26.721 64.799,27.137 61.793,27.499 50.875,28.225 31.511,28.316 24.205,29.046 41.775,29.166 61.211,29.337 21.294,29.414 38.042,29.449 45.509,29.676 31.401,30.329 26.881,30.484 13.875,31.025 60.095,31.431 62.91,31.733 2.207,32.736 55.051,32.825 56.973,33.136 36.09,33.721 31.375,34.525 14.175,34.825 31.375,36.825 51.733,36.861 55.573,36.98 1.677,37.001 58.357,37.293 36.061,37.851 12.6,39.3 57.377,39.567 54.672,39.606 49.583,39.661 39.286,39.689 44.236,39.774 1.714,39.992 13.975,41.925 1.747,43.814 61.572,44.233 47.684,44.708 55.338,44.742 36.747,45.027 42.39,45.218 31.134,45.983 13.4,46.5 58.514,47.016 45.069,47.705 40.031,47.737 50.49,47.928 34.578,48.279 6.3,48.4 28.807,48.407 8.788,48.51 55.142,48.506 12.275,48.925 61.415,48.976
IRQ: P4.5 P5.1 | length 73.6
  Top Layer w0.254: v1(19.3,6.5) 19.3,11.33 22.006,14.035 28.515,14.035 29.43,14.951 P4.5
  Bottom Layer w0.254: v1(19.3,6.5) 41.9,6.5 47.361,1.039 61.494,1.039 66.2,5.745 P5.1
NetC2_1: C2.1 D1.4 J2.2 R3.2 | length 6.1
  Bottom Layer w0.254: J2.2 22.17,39.871 C2.1 22.157,36.544 22.157,35.362 R3.2 23.597,35.349 23.6,35.352 D1.4
NetC3_1: C3.1 D1.6 J2.3 R4.2 | length 6.2
  Bottom Layer w0.254: D1.6 24.6,35.383 24.603,35.38 R4.2@25.737,35.38 ; J2.3 24.782,39.757 24.782,39.317 25.705,38.394 25.705,36.592 C3.1 25.713,36.514 25.713,35.404 R4.2@25.737,35.38 ; R4.2 R4.2@25.737,35.38
NetC4_1: C4.1 D1.5 J2.7 R5.1 R6.2 | length 18.3
  Top Layer w0.254: v1(22.723,32.792) 23.499,32.792 24.1,33.393 v1(24.1,36.1)
  Bottom Layer w0.254: v1(22.723,32.792) 22.727,32.796 23.588,32.796 R5.1 ; D1.5 v1(24.1,36.1) 24.1,38.454 23.4,39.154 23.4,41.769 24.7,43.07 J2.7 25,43.07 25.766,42.304 C4.1 27.848,42.301 27.848,41.147 R6.2
NetC5_1: C5.1 L1.1 U5.2 | length 3.5
  Bottom Layer w0.635: v1(54.824,24.225) 56.275,24.225 56.817,23.683 56.817,22.618 v1(56.949,22.487)
  other v1: 57.775,14.48 58.609,14.48 57.792,15.251 58.615,15.251 57.428,21.886 58.103,22.246 57.634,22.855
NetC5_2: C5.2 U5.6
NetC11_1: C11.1 R8.1 R9.2 U5.4 | length 6.3
  Top Layer w0.559: R8.1 57.569,30.997 57.569,29.497 C11.1 57.596,29.482 58.99,29.482 R9.2 58.995,29.422 59,29.417 59,27 58.649,26.649 58.614,26.649 58.593,26.629 U5.4
NetR7_2: R7.2 U5.5 | length 1.5
  Top Layer w0.559: U5.5@57.639,26.384 R7.2@57.639,27.901
RST: P4.3
RX0: P4.2
SCL: J1.40 P3.9 P5.3 P6.1 R2.1 | length 167.5
  Top Layer w0.254: J1.40 12.959,35.758 17.801,40.6 28.1,40.6 29.11,39.59 29.11,38.61 v1(29.1,38.6) 29.1,24.244 30.867,22.477 41.83,22.477 43.818,20.489 43.818,16.713 40.221,13.116 22.336,13.116 20.485,11.265 v1(20.485,5.338) ; R2.1 61.462,31.338 62.501,30.299 P6.1
  Bottom Layer w0.254: v1(20.485,5.338) 23.231,5.338 24.35,4.219 P3.9 ; v1(29.1,38.6) 32.545,38.6 35.258,41.313 59.442,41.313 61.2,39.555 61.2,31.591 62.491,30.3 64.493,30.3 ; P5.3 64.285,14.2 63.395,15.09 63.395,29.203 64.493,30.3 ; P6.1 66.199,30.3 64.493,30.3
SDA: J1.42 P3.8 P5.4 P6.2 R1.1 | length 164
  Top Layer w0.254: J1.42 12.207,36.258 17.423,41.474 29.169,41.474 30.188,40.455 30.188,39.602 v1(30.234,39.556) 30.234,24.466 31.196,23.504 42.496,23.504 44.815,21.185 44.815,16.135 40.715,12.034 22.874,12.034 21.81,10.971 P3.8 ; R1.1 62.625,34.675 64.499,32.801 P6.2
  Bottom Layer w0.254: v1(30.234,39.556) 31.956,39.556 34.748,42.348 59.767,42.348 62.236,39.879 62.236,33.894 63.329,32.801 P6.2 67.449,32.801 68.15,32.1 68.15,28.924 64.359,25.133 64.359,17.206 64.865,16.699 P5.4
SDO: P6.6
SIM_CLK: J1.14 R4.1 | length 25.4
  Top Layer w0.254: J1.14 15.858,29.258 18.541,31.941 18.541,35.714 20.613,37.786 25.628,37.786 26.803,36.611 26.803,35.628 v1(26.803,34.554)
  Bottom Layer w0.254: v1(26.803,34.554) 26.806,34.556 26.806,35.353 R4.1
SIM_IO: J1.12 R6.1 | length 32
  Top Layer w0.254: J1.12 16.66,28.76 19.706,31.806 19.706,35.597 21.014,36.904 24.996,36.904 25.6,36.3 25.6,34 26.1,33.5 27.3,33.5 27.832,34.032 v1(27.832,39.249)
  Bottom Layer w0.254: v1(27.832,39.249) 27.835,39.252 27.835,40.089 R6.1
SIM_NPRESENT: D1.3 J1.16 J2.10 | length 36.7
  Top Layer w0.254: J1.16 15.158,29.758 17.355,31.955 v1(17.355,35.306)
  Bottom Layer w0.254: J2.10 22.749,45.749 21.6,44.6 18.319,44.6 17.355,43.636 v1(17.355,35.306) 18.46,34.201 D1.3
SIM_RST: J1.10 R3.1 | length 15.6
  Top Layer w0.254: J1.10 17.56,28.26 21.091,31.791 v1(21.091,34.797)
  Bottom Layer w0.254: v1(21.091,34.797) R3.1
SIM_VCC: C1.1 D1.1 J1.8 J2.1 R5.2 | length 36.7
  Top Layer w0.254: 9.141,27.759 J1.8
  Top Layer w0.508: 9.141,27.759 8.541,27.759 8,28.3 8,31.3 9.2,32.5 15.2,32.5 16.251,33.551 16.251,35.951 17.1,36.8 v1(18.2,36.8)
  Bottom Layer w0.254: D1.1 24.603,34.198 24.603,32.835 R5.2
  Bottom Layer w0.457: 19.674,36.9 19.674,39.813 J2.1
  Bottom Layer w0.508: v1(16.251,33.724) 16.251,32.449 17.2,31.5 24.2,31.5 24.644,31.944 R5.2 ; v1(18.2,36.8) 19.574,36.8 19.674,36.9
TX0: P4.1
VBUS: P3.12
pads on no net: CN1.1 CN2.1 J1. J1.1 J1.7 J1.9 J1.13 J1.15 J1.17 J1.19 J1.20 J1.21 J1.22 J1.23 J1.32 J1.34 J1.35 J1.36 J1.37 J1.38 J1.41 J1.43 J1.44 J1.46 J1.47 J1.48 J1.49 J1.50 J1.52 J1.53 J1.54 J1.55 J1.56 J1.58 J1.59 J1.60 J1.61 J1.62 J1.63 J1.64 J1.65 J1.66 J1.67 J1.68 J1.69 J1.75 J1.76 J1.77 J2.6

## Polygon pours and split planes (outlines as drawn)
GND on Bottom Layer "NONET_L-01_P-001" (solid, pour order 1): 0,52 70,52 70,0 0,0
GND on Top Layer "NONET_L-01_P-001" (solid, pour order 0): 0,52 70,52 70,0 0,0

## Other copper
Top Layer:
  rectangle net 5V: 9.6,43.112 12,44.7
  rectangle net 3V3: 9.6,25.868 12.891,26.902
  rectangle net 12V: 50.9,2.9 54.3,8.2
  rectangle net 12V: 45.6,5.6 54.3,8.2
  rectangle net 5V: 49.6,9.704 53.7,17.1
  region net 5V: 55.058,31.486 55.058,30.55 56.379,30.55 56.379,31.486
  region net 12V: 55.118,28.399 55.118,27.463 56.439,27.463 56.439,28.399
  rectangle net NetC5_1: 54.388,23.9 55.325,25.222
  rectangle net NetC5_2: 54.3,25.94 57,26.872
  rectangle net 12V: 58.726,16.117 61.4,24.28
  rectangle net 12V: 58.257,23 59.7,24.28
  rectangle net NetC5_1: 57.406,9.692 60.1,15.538
  rectangle net NetC5_1: 56.664,21.626 58.36,22.749
  rectangle net NetC5_1: 57.253,21.626 58.042,24.3
Bottom Layer:
  rectangle net 3V3: 11.4,26 12.9,27
  rectangle net 3V3: 55.4,34.3 57.2,35.2
  rectangle net 12V: 50.7,2.5 54.9,10
  rectangle net 12V: 50.7,7.1 62.154,10
  rectangle net 12V: 59.9,7.1 62.154,19.3
  rectangle net NetC5_1: 56.5,21.9 59.1,23.1
  rectangle net NetC5_1: 57,14.1 59.1,23.1

## Silkscreen, mask and mechanical layers (free items; w line width, h text height)
Top Overlay:
  lines w0.127: 53.46,50.258 53.46,50.258
  lines w0.2: 0.22,0.97 0.22,18.75 43.4,18.75 43.4,0.97 0.22,0.97 ; 0.22,5.44 6.676,5.44 6.676,14.48 0.22,14.48 0.22,5.44
  lines w0.254: 10.629,24.259 10.629,20.258 53.46,20.258 53.46,50.258 10.629,50.258 10.629,46.258
  text "Notecard" at 27.74,31.506 h2
  text "1" at 1.568,25.705 h1
  text "D12" at 3.207,15.225 h1
  text "USB" at 3.689,8.55 h1.5 r90
  text "VIN" at 39.805,4.132 h1 r90
  text "GND" at 37.23,3.987 h1 r90
  text "D13" at 3.172,3.835 h1
  text "3V3" at 5.761,3.856 h1
  text "12V" at 61.724,3.311 h1 r90
  text "GND" at 62.829,3.325 h1 r90
Bottom Overlay:
  text "SDO" at 64.544,42.576 h1
  text "CSB" at 64.545,40.082 h1
  text "GND" at 64.545,37.589 h1
  text "3V3" at 64.544,35.096 h1
  text "BME688" at 67.9,34 h1.52 r270
  text "SDA" at 64.544,32.603 h1
  text "SCL" at 64.544,30.109 h1
  text "AB1" at 64.545,23.886 h1
  text "GND" at 64.545,21.403 h1
  text "3V3" at 64.544,18.92 h1
  text "SDA" at 64.544,16.437 h1
  text "BMV080" at 67.9,14.3 h1.52 r270
  text "SCL" at 64.544,13.954 h1
  text "ABO" at 64.545,11.47 h1
  text "IRQ" at 64.545,8.942 h1
  text "12V" at 52.496,6.346 h1 r270
  text "GND" at 57.506,6.345 h1 r270
Board Outline:
  drawing of 330 lines, arcs and shapes, not listed
  text "Layer" at 78.251,58.558 h1.52
  text "Name" at 88.662,58.558 h1.52
  text "Material" at 112.278,58.558 h1.52
  text "Thickness" at 134.116,58.558 h1.52
  text "Constant" at 150.622,58.558 h1.52
  text "Board Layer Stack" at 165.096,58.558 h1.52
  text "Top Overlay" at 88.662,55.51 h1.52
  text "Top Solder" at 88.662,52.462 h1.52
  text "Solder Resist" at 112.278,52.462 h1.52
  text "0.40mil" at 134.116,52.462 h1.52
  text "3.5" at 150.622,52.462 h1.52
  text "1" at 78.251,49.414 h1.52
  text "Top Layer" at 88.662,49.414 h1.52
  text "1.40mil" at 134.116,49.414 h1.52
  text "Dielectric 1" at 88.662,46.366 h1.52
  text "FR-4" at 112.278,46.366 h1.52
  text "59.45mil" at 134.116,46.366 h1.52
  text "4.8" at 150.622,46.366 h1.52
  text "2" at 78.251,43.318 h1.52
  text "Bottom Layer" at 88.662,43.318 h1.52
  text "1.40mil" at 134.116,43.318 h1.52
  text "Bottom Solder" at 88.662,40.27 h1.52
  text "Solder Resist" at 112.278,40.27 h1.52
  text "0.40mil" at 134.116,40.27 h1.52
  text "3.5" at 150.622,40.27 h1.52
  text "Bottom Overlay" at 88.662,37.222 h1.52
Drill Drawing:
  circle w0.254: c2.356,69.79 r0.847
  lines w0.254: 1.509,74.447 3.203,74.447 2.356,72.753 1.509,74.447 ; 1.509,76.987 1.933,76.987 2.356,76.563 2.779,76.987 3.203,76.987 2.779,77.41 3.203,77.833 2.779,77.833 2.356,78.257 1.933,77.833 1.509,77.833 1.933,77.41 1.509,76.987 ; 1.509,80.373 3.203,80.373 3.203,82.067 1.509,82.067 1.509,80.373 ; 1.509,84.607 1.933,84.607 1.933,84.183 2.779,84.183 2.779,84.607 3.203,84.607 3.203,85.453 2.779,85.453 2.779,85.877 1.933,85.877 1.933,85.453 1.509,85.453 1.509,84.607 ; 1.509,88.84 2.356,87.993 3.203,88.84 2.356,89.687 1.509,88.84 ; 1.509,91.803 1.509,92.227 1.933,92.65 1.509,93.073 1.509,93.497 1.933,93.497 2.356,93.073 2.779,93.497 3.203,93.497 3.203,93.073 2.779,92.65 3.203,92.227 3.203,91.803 2.779,91.803 2.356,92.227 1.933,91.803 1.509,91.803
  lines w0.381: -0.009,67.8 277.129,67.8 ; -0.009,94.47 277.129,94.47 ; 13.983,63.99 13.983,98.28 ; 28.965,63.99 28.965,98.28 ; 57.404,63.99 57.404,98.28 ; 70.254,63.99 70.254,98.28 ; 88.892,63.99 88.892,98.28 ; 126.981,63.99 126.981,98.28 ; 141.963,63.99 141.963,98.28 ; 160.906,63.99 160.906,98.28 ; 186.553,63.99 186.553,98.28 ; 208.239,63.99 208.239,98.28 ; 242.112,63.99 242.112,98.28 ; -0.009,63.99 277.129,63.99 277.129,98.28 -0.009,98.28 -0.009,63.99
  text "Symbol" at 2.277,95.613 h1.83
  text "Count" at 15.126,95.613 h1.83
  text "Hole Size" at 30.108,95.613 h1.83
  text "Plated" at 58.547,95.613 h1.83
  text "Hole Type" at 71.397,95.613 h1.83
  text "Drill Layer Pair" at 90.035,95.613 h1.83
  text "Via/Pad" at 128.124,95.613 h1.83
  text "Pad Shape" at 143.106,95.613 h1.83
  text "Template" at 162.049,95.613 h1.83
  text "Description" at 187.696,95.613 h1.83
  text "Hole Tolerance (+)" at 209.382,95.613 h1.83
  text "Hole Tolerance (-)" at 243.255,95.613 h1.83
  text "1" at 15.126,91.803 h1.52
  text "43.31mil (1.100mm)" at 30.108,91.803 h1.52
  text "PTH" at 58.547,91.803 h1.52
  text "Round" at 71.397,91.803 h1.52
  text "Top Layer - Bottom Layer" at 90.035,91.803 h1.52
  text "Pad" at 128.124,91.803 h1.52
  text "Rounded" at 143.106,91.803 h1.52
  text "c50h110(Tol8-8)" at 162.049,91.803 h1.52
  text "3.00mil (0.076mm)" at 209.382,91.803 h1.52
  text "3.00mil (0.076mm)" at 243.255,91.803 h1.52
  text "1" at 15.126,87.993 h1.52
  text "62.99mil (1.600mm)" at 30.108,87.993 h1.52
  text "PTH" at 58.547,87.993 h1.52
  text "Round" at 71.397,87.993 h1.52
  text "Top Layer - Bottom Layer" at 90.035,87.993 h1.52
  text "Pad" at 128.124,87.993 h1.52
  text "Rounded" at 143.106,87.993 h1.52
  text "c100h160(Tol8-8)" at 162.049,87.993 h1.52
  text "3.00mil (0.076mm)" at 209.382,87.993 h1.52
  text "3.00mil (0.076mm)" at 243.255,87.993 h1.52
  text "2" at 15.126,84.183 h1.52
  text "63.00mil (1.600mm)" at 30.108,84.183 h1.52
  text "PTH" at 58.547,84.183 h1.52
  text "Round" at 71.397,84.183 h1.52
  text "Top Layer - Bottom Layer" at 90.035,84.183 h1.52
  text "Pad" at 128.124,84.183 h1.52
  text "Rounded" at 143.106,84.183 h1.52
  text "c240h160" at 162.049,84.183 h1.52
  text "3" at 15.126,80.373 h1.52
  text "118.11mil (3.000mm)" at 30.108,80.373 h1.52
  text "PTH" at 58.547,80.373 h1.52
  text "Round" at 71.397,80.373 h1.52
  text "Top Layer - Bottom Layer" at 90.035,80.373 h1.52
  text "Pad" at 128.124,80.373 h1.52
  text "Rounded" at 143.106,80.373 h1.52
  text "c280h300(Tol8-8)" at 162.049,80.373 h1.52
  text "3.00mil (0.076mm)" at 209.382,80.373 h1.52
  text "3.00mil (0.076mm)" at 243.255,80.373 h1.52
  text "4" at 15.126,76.563 h1.52
  text "65.00mil (1.651mm)" at 30.108,76.563 h1.52
  text "NPTH" at 58.547,76.563 h1.52
  text "Round" at 71.397,76.563 h1.52
  text "Top Layer - Bottom Layer" at 90.035,76.563 h1.52
  text "Pad" at 128.124,76.563 h1.52
  text "Rounded" at 143.106,76.563 h1.52
  text "c165hn165" at 162.049,76.563 h1.52
  text "43" at 15.126,72.753 h1.52
  text "43.30mil (1.100mm)" at 30.108,72.753 h1.52
  text "PTH" at 58.547,72.753 h1.52
  text "Round" at 71.397,72.753 h1.52
  text "Top Layer - Bottom Layer" at 90.035,72.753 h1.52
  text "Pad" at 128.124,72.753 h1.52
  text "(Mixed)" at 143.106,72.753 h1.52
  text "(Mixed)" at 162.049,72.753 h1.52
  text "143" at 15.126,68.943 h1.52
  text "10.00mil (0.254mm)" at 30.108,68.943 h1.52
  text "PTH" at 58.547,68.943 h1.52
  text "Round" at 71.397,68.943 h1.52
  text "Top Layer - Bottom Layer" at 90.035,68.943 h1.52
  text "Via" at 128.124,68.943 h1.52
  text "Rounded" at 143.106,68.943 h1.52
  text "v51h25" at 162.049,68.943 h1.52
  text "197 Total" at 15.126,65.133 h1.52

## Dimensions
70,52 to 70,0 on Board Outline
0,52 to 70,52 on Board Outline